# Altium PCB devBoard.PcbDoc
Units mil, origin at the board's own origin, x right, y up, seen from the top; angles counter-clockwise.
Board outline 3937.01 x 2755.91 mil, 2 copper layers (Top Layer, Bottom Layer); 22 components, 46 nets, 97 pads, 0 vias.
Unrouted connection lines stored in the file: 2.
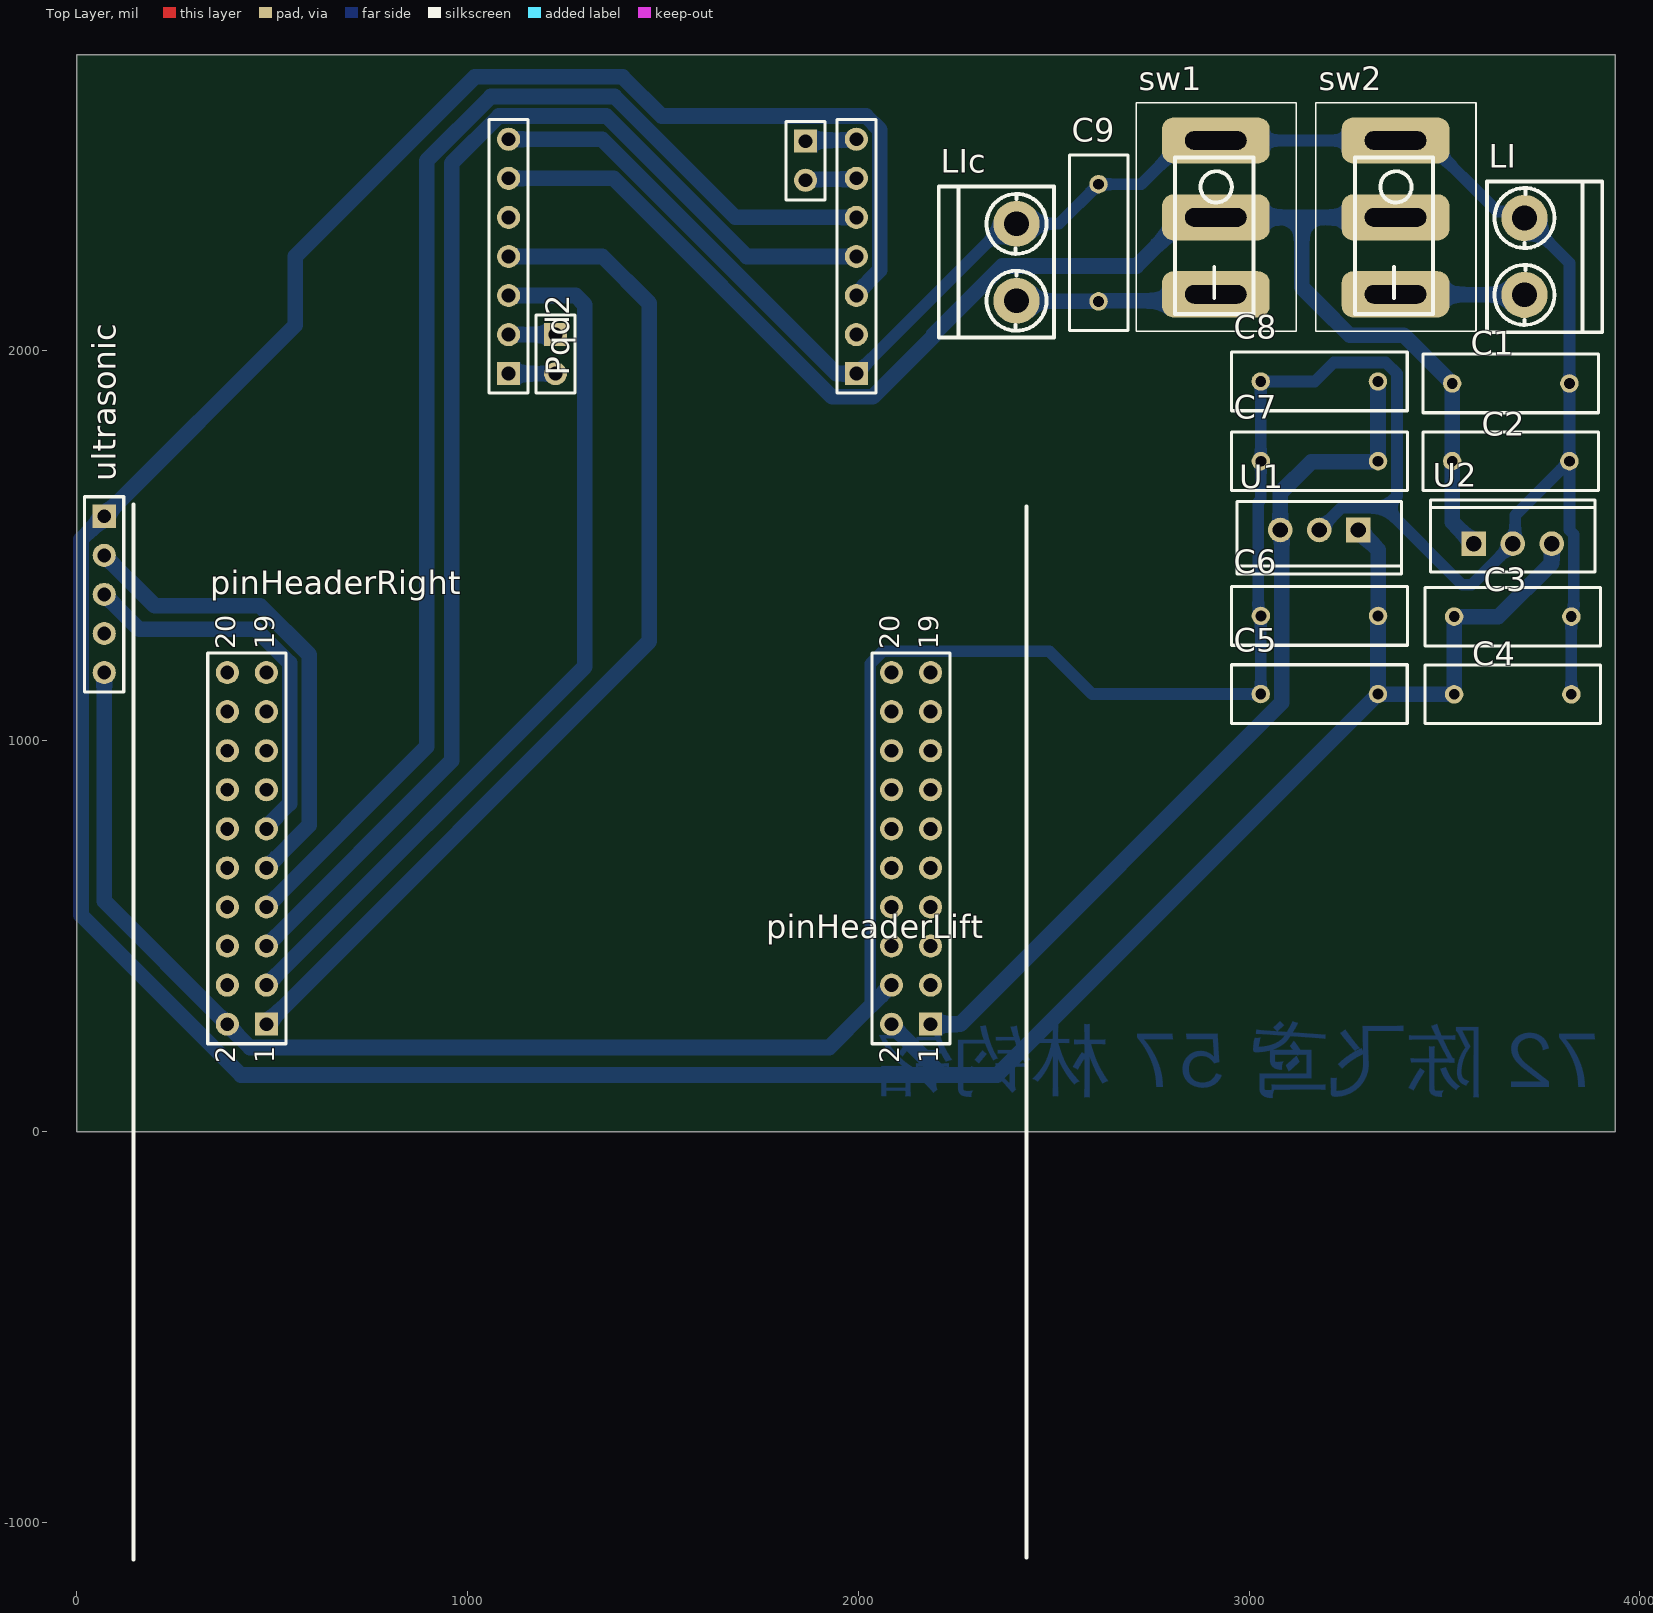
[diagram p0: Top Layer view]
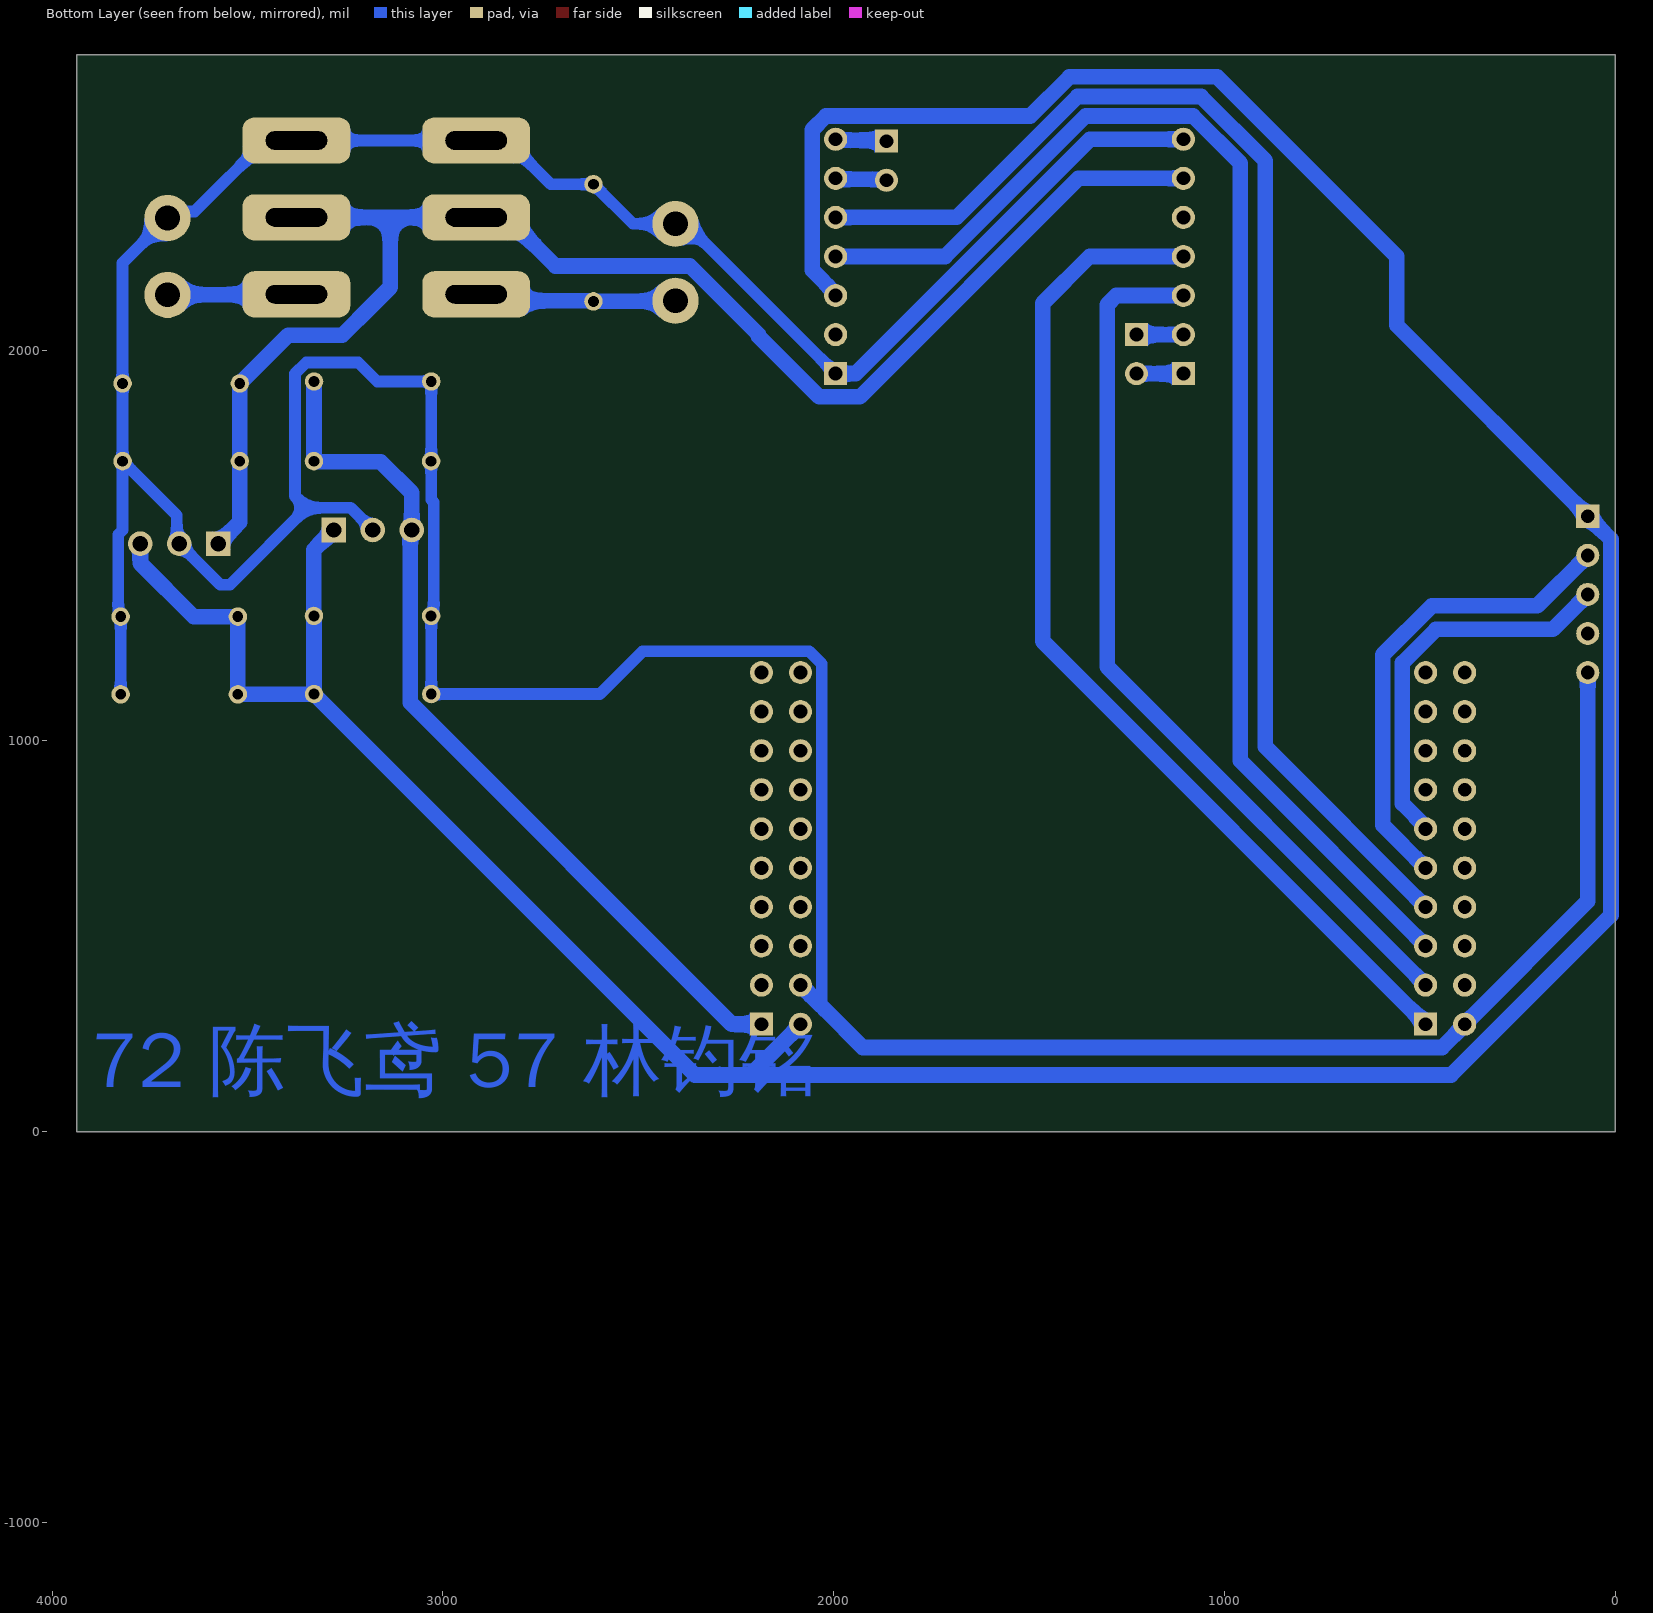
[diagram p1: Bottom Layer view, seen from below]

## Layer stack, top to bottom
Top Solder: solder mask 0.4, Solder Resist, Dk 3.5
Top Layer: signal copper 1.4
Dielectric 1: dielectric 12.6, FR-4, Dk 4.8
Bottom Layer: signal copper 1.4
Bottom Solder: solder mask 0.4, Solder Resist, Dk 3.5

## Board outline
0,0 3937.01,0 3937.01,2755.91 0,2755.91

## Design rules (kind name [scope] priority, off if disabled: settings)
Clearance [All] p1: gap=10 ignorepadtopadclearanceinfootprint=FALSE except(0: Arc-Hole Track-Hole SMDPad-Hole THPad-Hole Via-Hole Fill-Hole Poly-Hole Region-Hole Text-Hole)
PolygonConnect [All] p1: connectstyle=Relief reliefconductorwidth=10 reliefentries=4 polygonreliefangle="90 Angle" airgapwidth=10
RoutingLayers [All] p1: top layer_v5=FALSE bottom layer_v5=TRUE
RoutingVias [All] p1: holewidth=35.43 width=59.06 viastyle="Through Hole" minholewidth=35.43 minwidth=59.06 maxholewidth=35.43 maxwidth=59.06
SMDNeckDown [All] p1: percent=50.000
SolderMaskExpansion [All] p1: expansion=4
Width [All] p1: maxlimit=40 minlimit=30 preferedwidth=30
29 further rules are at their usual default settings.

## Classes and differential pairs
component class devBoard: C1 C2 C4 C5 C6 C7 C8 C9 k11 k22 LI LIc pinHeaderLift sw1 sw2 U1 U2 ultrasonic

## Components (designator, comment, footprint, x,y, rotation, side; value= is the part's Value field where it differs from the comment)
C1 "Cap" RAD-0.3 3670,1915 r180 top value=107
C2 "Cap" RAD-0.3 3670,1716.07 r180 top value=104
C3 "Cap" RAD-0.3 3675,1318.21 r180 top value=104
C4 "Cap" RAD-0.3 3675,1119.29 r180 top value=107
C5 "Cap" RAD-0.3 3180,1120 r0 top value=106
C6 "Cap" RAD-0.3 3180.36,1320 r0 top value=104
C7 "Cap" RAD-0.3 3180.36,1716.07 r0 top value=106
C8 "Cap" RAD-0.3 3180,1920 r0 top value=104
C9 "Cap" RAD-0.3 2615,2275 r270 top value=220uf
LI "LL" "Con 2接线端子" 3705,2240 r270 top
LIc "LL" "Con 2接线端子" 2405,2225 r90 top
pinHeaderLift "Header 10X2" HDR2X10 2185,275 r90 top
pinHeaderRight "Header 10X2" HDR2X10 485,275 r90 top
Ppp1 "Header 2" HDR1X2 1865,2535 r270 top
ppp2 "Header 2" HDR1X2 1225,2040 r270 top
Pqd1 "Header 7" HDR1X7 1995,1940 r90 top
Pqd2 "Header 7" HDR1X7 1105,1940 r90 top
sw1 "船型开关 3脚" "船型开关 3脚" 2915,2340 r90 top
sw2 "船型开关 3脚" "船型开关 3脚" 3375,2340 r90 top
U1 "asm1117" T03B 3180,1540 r180 top
U2 "LM2940CT-5.0" T03B 3675,1505 r0 top
ultrasonic "Header 5" HDR1X5 70,1575 r270 top

## Footprints (in the part's own frame and the unit in brackets; to place one, negate y for a bottom-side part, rotate by r counter-clockwise, add the part's x,y. Pads: shape width x height; smd on the part's side, far side on the other; paste and mask are expansions set on the pad)
"Con 2接线端子" [mm]
  round 3 hole 1.6: 0(-2.5,0) 1(2.5,0)
  silkscreen extent -4.88,-2.44 4.93,5.05
HDR1X2 [mm] "Connector; Header; 2 Position"
  rect 1.5x1.5 hole 0.9: 1(0,0)
  round 1.5 hole 0.9: 2(2.54,0)
  silkscreen extent -1.27,-1.27 3.81,1.27
HDR1X5 [mm] "Connector; Header; 5 Position"
  rect 1.5x1.5 hole 0.9: 1(0,0)
  round 1.5 hole 0.9: 2(2.54,0) 3(5.08,0) 4(7.62,0) 5(10.16,0)
  silkscreen extent -1.27,-1.27 11.43,1.27
HDR1X7 [mm] "Connector; Header; 7 Position"
  rect 1.5x1.5 hole 0.9: 1(0,0)
  round 1.5 hole 0.9: 2(2.54,0) 3(5.08,0) 4(7.62,0) 5(10.16,0) 6(12.7,0) 7(15.24,0)
  silkscreen extent -1.27,-1.27 16.51,1.27
HDR2X10 [mm] "Connector; Header; 10x2 Position"
  rect 1.5x1.5 hole 0.9: 1(0,0)
  round 1.5 hole 0.9: 2(0,2.54) 3(2.54,0) 4(2.54,2.54) 5(5.08,0) 6(5.08,2.54) 7(7.62,0) 8(7.62,2.54) 9(10.16,0) 10(10.16,2.54) 11(12.7,0) 12(12.7,2.54) 13(15.24,0) 14(15.24,2.54) 15(17.78,0) 16(17.78,2.54) 17(20.32,0) 18(20.32,2.54) 19(22.86,0) 20(22.86,2.54)
  silkscreen extent -1.27,-1.27 24.13,3.81
RAD-0.3 [mm] "Radial Cap, Thru-Hole; 2 Leads; 0.3 in Pin Spacing"
  round 1.2 hole 0.7: 1(-3.81,0) 2(3.81,0)
  silkscreen extent -5.71,-1.9 5.71,1.91
T03B [mm] "TO, Thru-Hole, Vertical, Heatsink Mounted; 3 In-Line Leads; Pitch 2.54 mm"
  rect 1.6x1.6 hole 1: 1(-2.54,0)
  round 1.6 hole 1: 2(0,0) 3(2.54,0)
  silkscreen extent -5.35,-1.85 5.35,2.85
"船型开关 3脚" [mm]
  rrect50% 3x7 hole 1.2 slot 4 at 90 deg: 1(5,0) 2(0,0) 3(-5,0)
  silkscreen extent -7.42,-5.23 7.44,5.18, body extent -7.53,-5.25 7.53,5.25, height 14.51

## Part data
C1 C2 C3 C4 C5 C6 C7 C8 C9: "Capacitor", LatestRevisionDate=17-Jul-2002, LatestRevisionNote="Re-released for DXP Platform.", PackageDescription="Radial Cap, Thru-Hole; 2 Leads; 0.3 in Pin Spacing", PackageReference=RAD-0.3, Published=8-Jun-2000, Publisher="Altium Limited"
LI LIc: library part "Header 2", "Header, 2-Pin", LatestRevisionDate=17-Jul-2002, LatestRevisionNote="Re-released for DXP Platform.", Publisher="Altium Limited"
pinHeaderLift pinHeaderRight: "Header, 10-Pin, Dual row", LatestRevisionDate=17-Jul-2002, LatestRevisionNote="Re-released for DXP Platform.", Publisher="Altium Limited"
Ppp1 ppp2: "Header, 2-Pin", LatestRevisionDate=17-Jul-2002, LatestRevisionNote="Re-released for DXP Platform.", Publisher="Altium Limited"
Pqd1 Pqd2: "Header, 7-Pin", LatestRevisionDate=17-Jul-2002, LatestRevisionNote="Re-released for DXP Platform.", Publisher="Altium Limited"
U1: library part LM2940CT-5.0, "1A 5V", ComponentLink1Description="Manufacturer Link", ComponentLink1URL=http://www.national.com/, ComponentLink2Description=Datasheet, ComponentLink2URL=http://www.national.com/ds.cgi/LM/LM2940.pdf, ComponentLink3Description="URL Link1", ComponentLink3URL=http://www.national.com/pf/LM/LM2940C.html, DatasheetVersion=Jun-1999, Note="Tab is connected to GND", PackageDescription="TO, Thru-Hole, Vertical, Heatsink Mounted; 3 In-Line Leads; Pitch 2.54 mm", PackageReference=T03B, PackageVersion=1995, Published=15-Apr-2002, Publisher="Altium Limited"
U2: "1A 5V", ComponentLink1Description="Manufacturer Link", ComponentLink1URL=http://www.national.com/, ComponentLink2Description=Datasheet, ComponentLink2URL=http://www.national.com/ds.cgi/LM/LM2940.pdf, ComponentLink3Description="URL Link1", ComponentLink3URL=http://www.national.com/pf/LM/LM2940C.html, DatasheetVersion=Jun-1999, Note="Tab is connected to GND", PackageDescription="TO, Thru-Hole, Vertical, Heatsink Mounted; 3 In-Line Leads; Pitch 2.54 mm", PackageReference=T03B, PackageVersion=1995, Published=15-Apr-2002, Publisher="Altium Limited"
ultrasonic: "Header, 5-Pin", LatestRevisionDate=17-Jul-2002, LatestRevisionNote="Re-released for DXP Platform.", Publisher="Altium Limited"

## Nets (pads, with @x,y where several pads share a name; then routed paths per layer and width w, separated by ;. In a path a pad name is that pad's centre, name@x,y a point inside that pad or via, vN(x,y) a via of type N, cw(c..) or ccw(c..) an arc to the next point about the centre after c; other vN are vias at no path point)
3.3v: C7.2 C8.2 pinHeaderLift.1 U1.3 | length 2266.5
  Bottom Layer w40: pinHeaderLift.1 2260.83,275 3083.98,1098.15 3083.98,1536.02 U1.3 3080,1635 3159.68,1714.68 3328.97,1714.68 C7.2 3330.18,1716.25 3330.18,1919.82 C8.2
7.4v: C1.2 C2.2 Pqd1.2 Pqd2.6 sw1.2 sw2.2 U2.1 | length 3793
  Bottom Layer w40: Pqd2.6 1373.44,2440 1932.96,1880.47 1985,1880.47 2036.95,1880.47 2192.48,2036 2192.48,2040 2368.11,2215.63 2711.89,2215.63 2836.26,2340 sw1.2 3135,2340 ; sw2.2 3135,2340 ; U2.1 3520,1560 C2.2 C1.2 3396.22,2038.78 3257.39,2038.78 3181.17,2115 3135,2161.17 3135,2340
+5: C3.2 C4.2 C5.2 C6.2 pinHeaderLift.2 Pqd1.3 Pqd2.5 U1.1 U2.3 ultrasonic.1 | length 9368.9
  Bottom Layer w40: Pqd1.3 1995,2145.16 2055,2205.16 2055,2564.18 2019.66,2599.53 1496.75,2599.53 1396.75,2699.53 1018.17,2699.53 559.22,2240.58 559.22,2064.22 ultrasonic.1 10.47,1515.47 10.47,554.53 420,145 2205,145 ; pinHeaderLift.2 2085,273.52 2205,153.52 2205,145 ; U1.1 3330.36,1489.64 C6.2 3330.18,1319.82 3330.18,1120.18 C5.2 ; U2.3 3775,1455 3638.21,1318.21 C3.2 C4.2 3524.64,1119.64 3330.36,1119.64 C5.2 ; 2205,145 2355,145 C5.2
GND: C1.1 C2.1 C3.1 C4.1 C5.1 C6.1 C7.1 C8.1 C9.1 LI.0 LIc.1 pinHeaderLift.4 pinHeaderRight.2 Pqd1.1 Pqd2.7 sw1.1 sw2.1 U1.2 U2.2 ultrasonic.5 | length 11666.8
  Bottom Layer w30: Pqd1.1 2361.57,2306.57 2388.14,2306.57 LIc.1 2405.3,2323.72 2513.72,2323.72 C9.1 2724.41,2425 2836.26,2536.85 sw1.1 sw2.1 3453.74,2536.85 3635.31,2355.28 3688.14,2355.28 LI.0 3820,2223.42 C1.1 C2.1 ; 2022.5,312.5 2030.47,320.47 2030.47,1197.59 2062.41,1229.53 2489.11,1229.53 2598.64,1120 C5.1 3030.18,1120.18 3030.18,1319.82 C6.1 3030.36,1324.67 3023.5,1331.52 3023.5,1610.57 3030.36,1617.43 C7.1 3030.18,1716.25 3030.18,1919.82 C8.1 3168.09,1920 3216.71,1968.62 3350.14,1968.62 3378.98,1939.78 3378.98,1626.82 3348.65,1596.5 ; U1.2 3236.5,1596.5 3348.65,1596.5 ; C4.1 C3.1 3825,1322.88 3831.5,1329.38 3831.5,1528.4 3820,1539.9 C2.1 ; 3348.65,1596.5 3545.15,1400 3570,1400 U2.2 3681.31,1511.31 3681.31,1577.38 C2.1
  Bottom Layer w40: ultrasonic.5 70,590 pinHeaderRight.2 385,273.52 443.05,215.47 1925.47,215.47 2022.5,312.5 ; Pqd2.7 1344.15,2540 1944.15,1940 Pqd1.1 ; 2030.47,320.47 pinHeaderLift.4
NetC9_2: C9.2 LIc.0 sw1.3 | length 520.6
  Bottom Layer w40: LIc.0 2405.79,2125.79 2614.21,2125.79 C9.2 2616.39,2126.39 2898.24,2126.39 sw1.3 sw1.3@2913.29,2144.86
NetLI_1: LI.1 sw2.3 | length 330.7
  Bottom Layer w40: sw2.3 3375.79,2142.36 3704.21,2142.36 LI.1
NetPpp1_1: Ppp1.1 Pqd1.7 | length 132.1
  Bottom Layer w40: Ppp1.1 1867.5,2537.5 1992.5,2537.5 Pqd1.7
NetPpp1_2: Ppp1.2 Pqd1.6 | length 132.1
  Bottom Layer w40: Ppp1.2 1867.5,2437.5 1992.5,2437.5 Pqd1.6
Netppp2_1: ppp2.1 Pqd2.2 | length 120
  Bottom Layer w40: Pqd2.2 ppp2.1
Netppp2_2: ppp2.2 Pqd2.1 | length 120
  Bottom Layer w40: Pqd2.1 ppp2.2
P1.2: pinHeaderRight.11 ultrasonic.3 | length 996.5
  Bottom Layer w40: ultrasonic.3 159.49,1285.51 458.68,1285.51 544.53,1199.66 544.53,839.68 485,780.16 pinHeaderRight.11
P1.3: pinHeaderRight.9 ultrasonic.2 | length 1220.7
  Bottom Layer w40: ultrasonic.2 199.14,1345.86 469.03,1345.86 594.53,1220.37 594.53,784.53 pinHeaderRight.9
P1.4: pinHeaderRight.7 Pqd1.5 | length 3376.1
  Bottom Layer w40: pinHeaderRight.7 895,985 895,2484.9 1059.63,2649.53 1376.04,2649.53 1685.57,2340 Pqd1.5
P1.5: pinHeaderRight.5 Pqd1.4 | length 3434.7
  Bottom Layer w40: pinHeaderRight.5 959.67,949.67 959.67,2478.86 1080.34,2599.53 1355.33,2599.53 1714.86,2240 Pqd1.4
P1.6: pinHeaderLift.9
P2.0: pinHeaderRight.4
P2.2: pinHeaderRight.6
P2.3: pinHeaderRight.18
P2.4: pinHeaderRight.3 Pqd2.3 | length 2283.9
  Bottom Layer w40: pinHeaderRight.3 1300,1190 1300,2116.57 1276.57,2140 Pqd2.3
P2.5: pinHeaderRight.1 Pqd2.4 | length 2660.6
  Bottom Layer w40: pinHeaderRight.1 1465,1255 1465,2120 1345,2240 Pqd2.4
P2.6: pinHeaderRight.16
P2.7: pinHeaderLift.15
P3.0: pinHeaderRight.12
P3.1: pinHeaderRight.14
P3.2: pinHeaderLift.13
P3.3: pinHeaderLift.7
P3.4: pinHeaderLift.5
P3.5: pinHeaderLift.20
P3.6: pinHeaderLift.18
P3.7: pinHeaderRight.17
P4.0: pinHeaderRight.15
P4.1: pinHeaderLift.19
P4.2: pinHeaderLift.17
P4.3: pinHeaderRight.13
P6.0: pinHeaderLift.6
P6.1: pinHeaderLift.8
P6.2: pinHeaderLift.10
P6.3: pinHeaderLift.12
P6.4: pinHeaderLift.14
P6.5: pinHeaderLift.3
P6.6: pinHeaderLift.11
P7.0: pinHeaderLift.16
P7.4: pinHeaderRight.8
P8.1: pinHeaderRight.20
P8.2: pinHeaderRight.19
RST: pinHeaderRight.10
pads on no net: ultrasonic.4

## Other copper
Bottom Layer:
  text "72 陈飞鸢 57 林钧铭" at 3900,65 h250

## Silkscreen, mask and mechanical layers (free items; w line width, h text height)
Top Overlay:
  lines w10: 145,-1095 145,1605 ; 2430,-1090 2430,1600

## Text inside footprints (layer, text, board x,y; h text height)
pinHeaderLift: Top Overlay "20" at 2105,1235 h50 r90; Top Overlay "19" at 2205,1235 h50 r90; Top Overlay "1" at 2205,175 h50 r90; Top Overlay "2" at 2105,175 h50 r90
pinHeaderRight: Top Overlay "2" at 405,175 h50 r90; Top Overlay "1" at 505,175 h50 r90; Top Overlay "19" at 505,1235 h50 r90; Top Overlay "20" at 405,1235 h50 r90